# Altium PCB sparkroad_PCB.PcbDoc
Units mil, origin at the board's own origin, x right, y up, seen from the top; angles counter-clockwise.
Board outline 2401.97 x 1320.71 mil, 2 copper layers (Top Layer, Bottom Layer); 5 components, 15 nets, 65 pads, 30 vias.
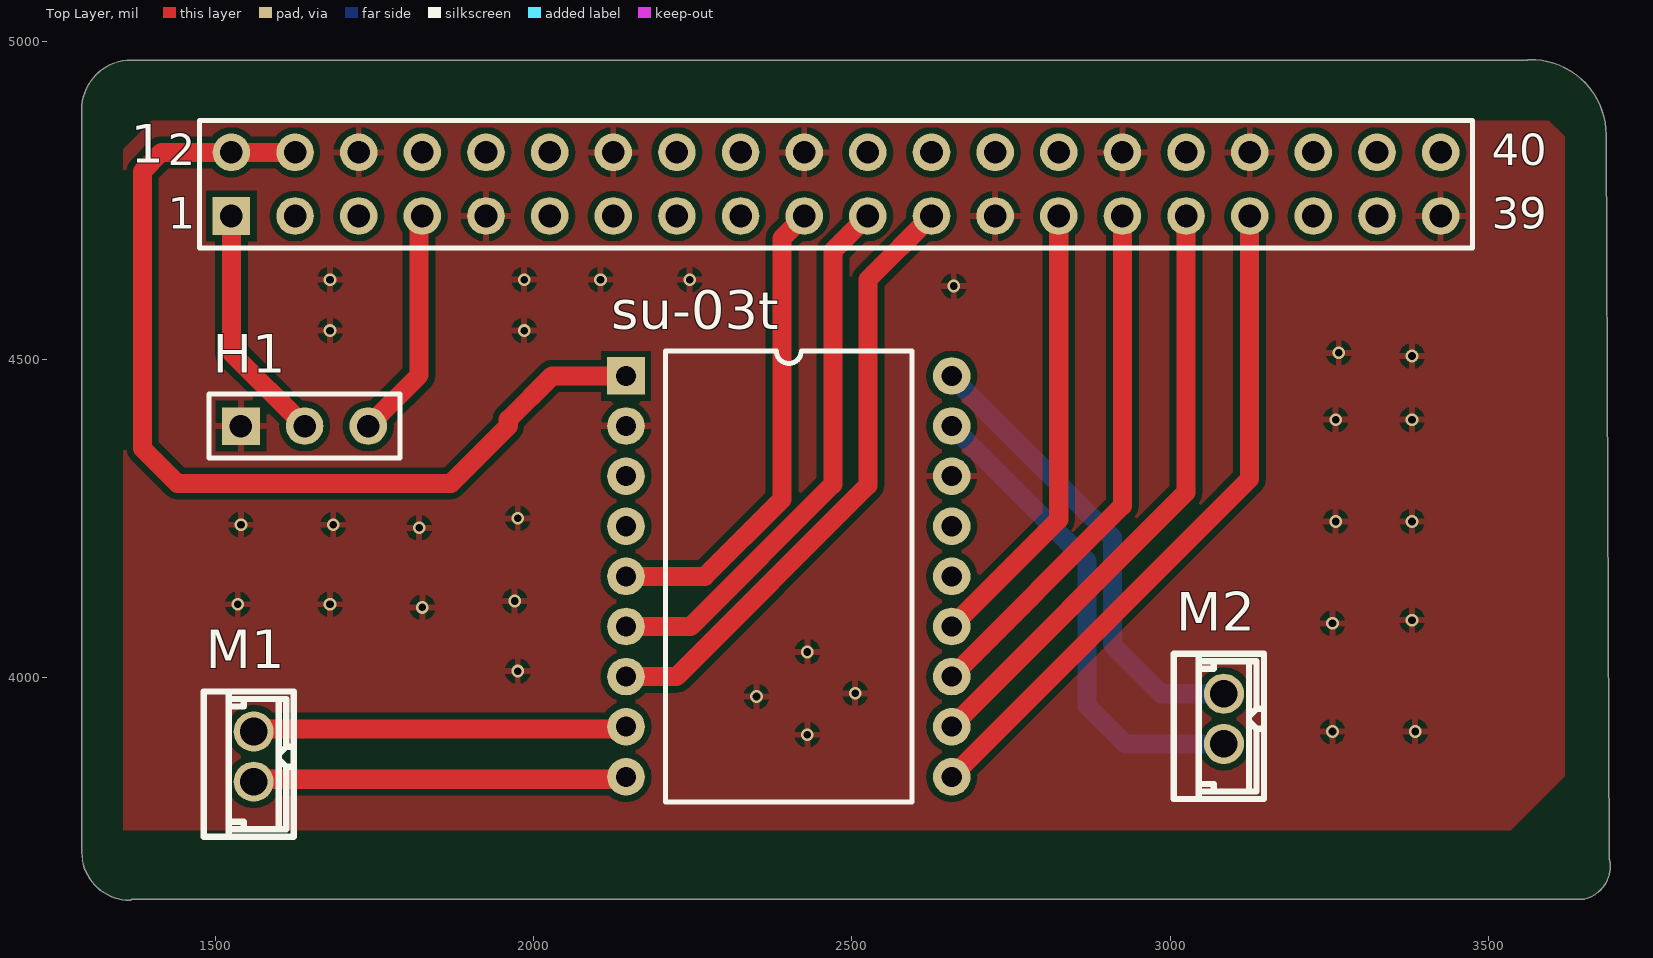
[diagram p0: Top Layer view]
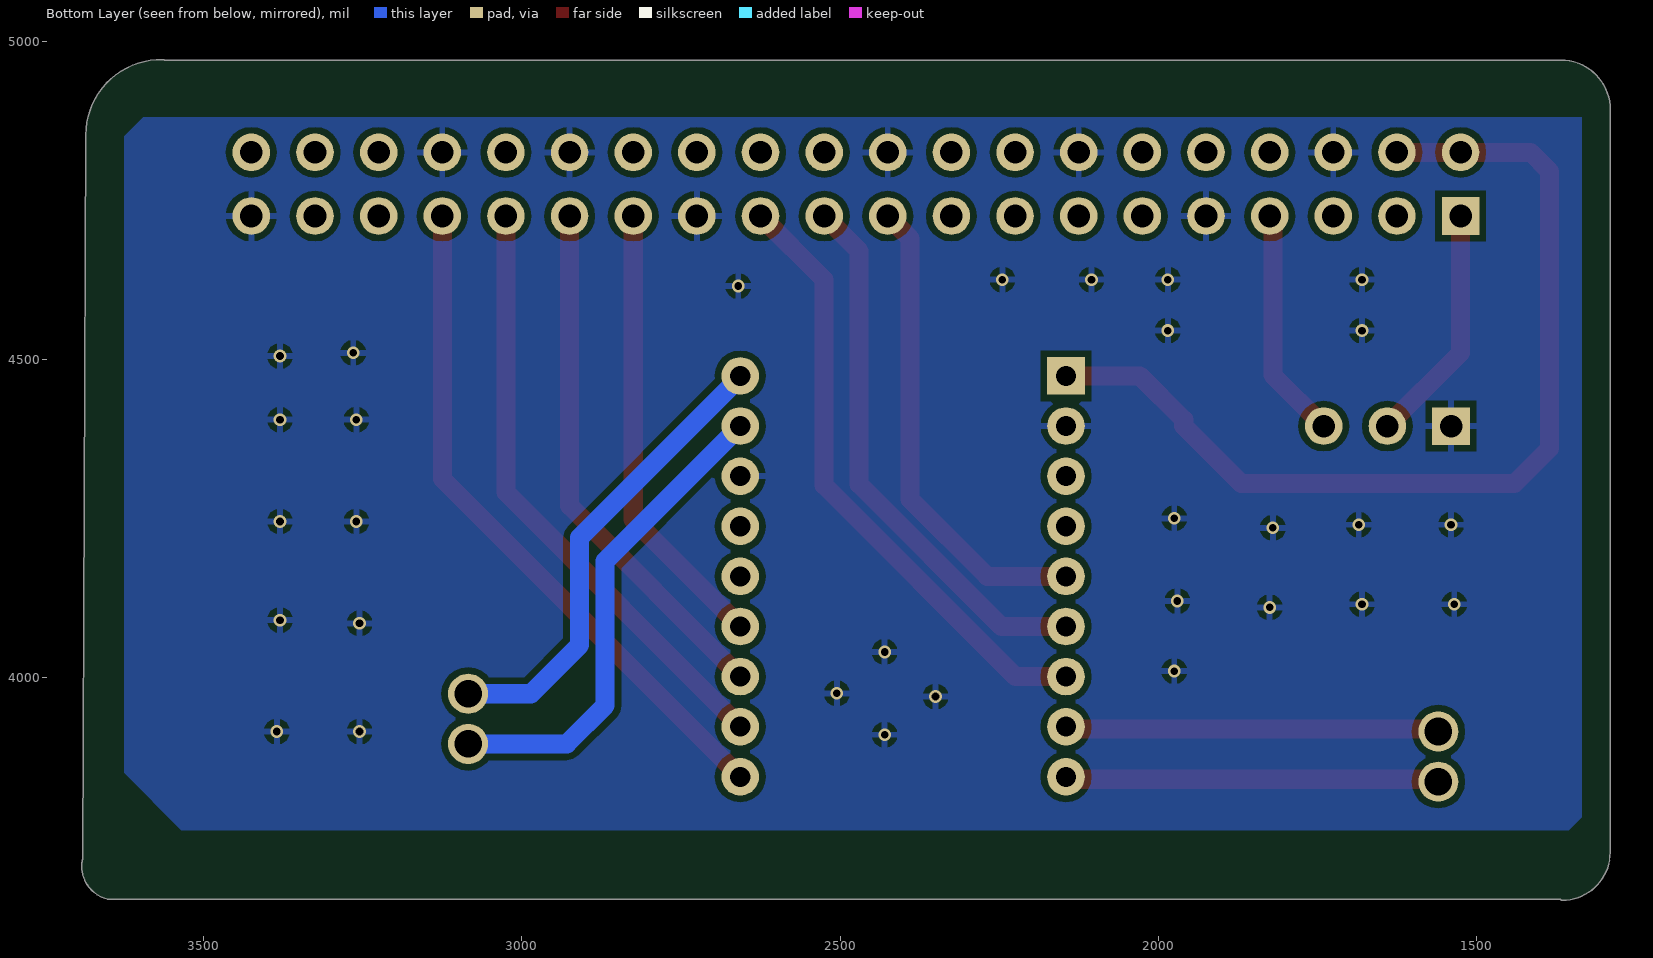
[diagram p1: Bottom Layer view, seen from below]

## Layer stack, top to bottom
Top Solder: solder mask 0.4, Solder Resist, Dk 3.5
Top Layer: signal copper 1.4
Dielectric 1: dielectric 12.6, FR-4, Dk 4.8
Bottom Layer: signal copper 1.4
Bottom Solder: solder mask 0.4, Solder Resist, Dk 3.5

## Board outline
1365,3649.99 cw(c1365,3725) 1289.98,3725 1289.98,4884.77 cw(c1368.07,4891.93) 1360.67,4969.99 cw(c1361.14,4965) 1361.14,4970.02 3561.81,4970.02 cw(c3564.32,4965.68) 3564.21,4970.69 cw(c3566.84,4852.51) 3685.04,4852.51 cw(c3566.84,4852.51) 3685.03,4851.12 cw(c3680.15,4850) 3685.16,4850.02 3690.26,3715.61 cw(c3638.47,3703.48) 3691.66,3703.48 cw(c3638.47,3703.48) 3651.2,3651.83 cw(c3650,3656.7) 3650,3651.69 1368.77,3651.69 cw(c1365,3655)

## Design rules (kind name [scope] priority, off if disabled: settings)
Clearance [All] p1: gap=10 ignorepadtopadclearanceinfootprint=FALSE except(0: Arc-Hole Track-Hole SMDPad-Hole THPad-Hole Via-Hole Fill-Hole Poly-Hole Region-Hole Text-Hole)
PolygonConnect [All] p1: connectstyle=Relief reliefconductorwidth=10 reliefentries=4 polygonreliefangle="90 Angle" airgapwidth=10
RoomDefinition sparkroad_sheet1 [InComponentClass('sparkroad_sheet1')] p1: confinementstyle=ConfineIn formatcopy=TRUE lockcomponents=FALSE outline 0,0 2000,0 2000,1000 0,1000
RoutingVias [All] p1: holewidth=28 width=50 viastyle="Through Hole" minholewidth=28 minwidth=50 maxholewidth=28 maxwidth=50
SolderMaskExpansion [All] p1: expansion=4 istentingtop=FALSE
Width [All] p1: maxlimit=50 minlimit=10 preferedwidth=30 minimp=50.000000 maximp=50.000000 favimp=50.000000
30 further rules are at their usual default settings.

## Components (designator, comment, footprint, x,y, rotation, side; value= is the part's Value field where it differs from the comment)
1 "band_ex" HDR2X20 1525,4725 r0 top
H1 "Component_1" HDR1X3 1540,4395 r0 top
M1 "Component_1" PCBComponent_1 1550,3800.6 r180 top
M2 "voice" PCBComponent_1 3074.45,3859.95 r180 top
su-03t "Component_1" SU-03T 2145,4473.74 r0 top

## Footprints (in the part's own frame and the unit in brackets; to place one, negate y for a bottom-side part, rotate by r counter-clockwise, add the part's x,y. Pads: shape width x height; smd on the part's side, far side on the other; paste and mask are expansions set on the pad)
HDR1X3 [mm] "Connector; Header; 3 Position"
  rect 1.5x1.5 hole 0.9: 1(0,0)
  round 1.5 hole 0.9: 2(2.54,0) 3(5.08,0)
  silkscreen extent -1.27,-1.27 6.35,1.27
HDR2X20 [mm] "Connector; Header; 20x2 Position"
  rect 1.5x1.5 hole 0.9: 1(0,0)
  round 1.5 hole 0.9: 2(0,2.54) 3(2.54,0) 4(2.54,2.54) 5(5.08,0) 6(5.08,2.54) 7(7.62,0) 8(7.62,2.54) 9(10.16,0) 10(10.16,2.54) 11(12.7,0) 12(12.7,2.54) 13(15.24,0) 14(15.24,2.54) 15(17.78,0) 16(17.78,2.54) 17(20.32,0) 18(20.32,2.54) 19(22.86,0) 20(22.86,2.54) 21(25.4,0) 22(25.4,2.54) 23(27.94,0) 24(27.94,2.54) 25(30.48,0) 26(30.48,2.54) 27(33.02,0) 28(33.02,2.54) 29(35.56,0) 30(35.56,2.54) 31(38.1,0) 32(38.1,2.54) 33(40.64,0) 34(40.64,2.54) 35(43.18,0) 36(43.18,2.54) 37(45.72,0) 38(45.72,2.54) 39(48.26,0) 40(48.26,2.54)
  silkscreen extent -1.27,-1.27 49.53,3.81
PCBComponent_1 [mm]
  round 1.6 hole 1.1 paste+0 mask+0.051: 1(-0.254,-0.904) 2(-0.254,-2.906)
  silkscreen extent -1.85,-4.5 1.75,1.29
SU-03T [mm]
  rect 1.5x1.5 hole 0.8: 1(0,0)
  round 1.5 hole 0.8: 2(0,-2) 3(0,-4) 4(0,-6) 5(0,-8) 6(0,-10) 7(0,-12) 8(0,-14) 9(0,-16) 10(13,-16) 11(13,-14) 12(13,-12) 13(13,-10) 14(13,-8) 15(13,-6) 16(13,-4) 17(13,-2) 18(13,0)
  silkscreen extent 1.58,-17 11.42,1

## Part data
1 M2: library part Component_1

## Via types
v1: diameter 20, hole 12, Top Layer to Bottom Layer, 30 vias

## Nets (pads, with @x,y where several pads share a name; then routed paths per layer and width w, separated by ;. In a path a pad name is that pad's centre, name@x,y a point inside that pad or via, vN(x,y) a via of type N, cw(c..) or ccw(c..) an arc to the next point about the centre after c; other vN are vias at no path point)
3.3V: 1.1 H1.2 | length 377.6
  Top Layer w30: 1.1 1525,4510 H1.2
B2: 1.23 su-03t.7 | length 969.1
  Top Layer w30: su-03t.7 2224.44,4001.3 2525,4301.86 2525,4625 1.23
B5: 1.19 su-03t.5 | length 754.7
  Top Layer w30: su-03t.5 2268.78,4158.78 2390,4280 2390,4690 1.19
B6: 1.21 su-03t.6 | length 861.9
  Top Layer w30: su-03t.6 2246.61,4080.04 2470,4303.43 2470,4670 1.21
down: 1.29 su-03t.12 | length 842.7
  Top Layer w30: su-03t.12 2925,4269.49 1.29 1.29@2919.44,4719.44
GND: 1.6 1.9 1.14 1.20 1.25 1.30 1.34 1.39 H1.1 su-03t.2 su-03t.16 | length 7.9
  Bottom Layer w30: su-03t.2@2137.14,4395 su-03t.2
  other v1: 2430,3910 3255,3915 3385,3915 2350,3970 2505,3975 1975,4010 2430,4040 3255,4085 3380,4090 1825,4110 1535,4115 1680,4115 1970,4120 1820,4235 1540,4240 1685,4240 3260,4245 3380,4245 1975,4250 3260,4405 3380,4405 3380,4505 3265,4510 1680,4545 1985,4545 2660,4615 1680,4625 1985,4625 2105,4625 2245,4625
hongwai: 1.7 H1.3 | length 365.2
  Top Layer w30: H1.3 1820,4475 1820,4720 1.7
left: 1.31 su-03t.11 | length 962.8
  Top Layer w30: su-03t.11 3025,4290.75 1.31 1.31@3019.44,4719.44
NetM1_1: M1.1 su-03t.9 | length 588.2
  Top Layer w30: M1.1 1563.81,3840.01 2141.19,3840.01 su-03t.9
NetM1_2: M1.2 su-03t.8 | length 588.1
  Top Layer w30: M1.2 1563.78,3918.78 2141.22,3918.78 su-03t.8
NetM2_1: M2.1 su-03t.17 | length 772.7
  Top Layer w30: M2.1 M2.1@3088.23,3891.77
  Bottom Layer w30: su-03t.17 2869.31,4182.51 2869.31,3955.69 2929.45,3895.55 M2.1
NetM2_2: M2.2 su-03t.18 | length 739.8
  Top Layer w30: M2.2 M2.2@3088.26,3970.54
  Bottom Layer w30: su-03t.18 2656.81,4472.11 2909.31,4219.62 2909.31,4050.69 2985.65,3974.35 M2.2
right: 1.33 su-03t.10 | length 1083
  Top Layer w30: su-03t.10 3125,4312.01 1.33 1.33@3119.44,4719.44
up: 1.27 su-03t.13 | length 714.6
  Top Layer w30: su-03t.13 2825,4248.23 1.27
VCC: 1.2 1.4 su-03t.1 | length 1546
  Top Layer w30: 1.4 1.2 1415,4825 1385,4795 1385,4360 1440,4305 1870,4305 1960,4395 1960,4405 2028.74,4473.74 su-03t.1
pads on no net: 1.3 1.5 1.8 1.10 1.11 1.12 1.13 1.15 1.16 1.17 1.18 1.22 1.24 1.26 1.28 1.32 1.35 1.36 1.37 1.38 1.40 su-03t.3 su-03t.4 su-03t.14 su-03t.15

## Polygon pours and split planes (outlines as drawn)
GND on Top Layer "GND_L01_P000" (solid, remove dead copper, pour order 0): 1355,4830 1400,4875 3595,4875 3620,4850 3620,3845 3535,3760 1355,3760
GND on Bottom Layer "GND_L02_P001" (solid, remove dead copper, pour order 1): 1335,4880 3595,4880 3625,4850 3625,3850 3535,3760 1355,3760 1335,3780

## Silkscreen, mask and mechanical layers (free items; w line width, h text height)
Mechanical 1:
  lines w10: 1350.81,3656.7 3650,3656.7 ccw(c3638.47,3703.48) 3685.25,3715 3680.15,4850 ; 1365,3655 cw(c1365,3725) 1295,3725 1295,4885 cw(c1368.07,4891.93) 1361.14,4965 3565,4965 ; 3564.32,4965.68 cw(c3566.84,4852.51) 3680,4850

## Text inside footprints (layer, text, board x,y; h text height)
1: Top Overlay "2" at 1425,4805 h50; Top Overlay "40" at 3505,4805 h50; Top Overlay "39" at 3505,4705 h50